# Altium PCB Car.PcbDoc
Units mm, origin at the board's own origin, x right, y up, seen from the top; angles counter-clockwise.
Board outline 55.67 x 34.21 mm, 2 copper layers (Top Layer, Bottom Layer); 28 components, 28 nets, 132 pads, 18 vias.
Unrouted connection lines stored in the file: 5.
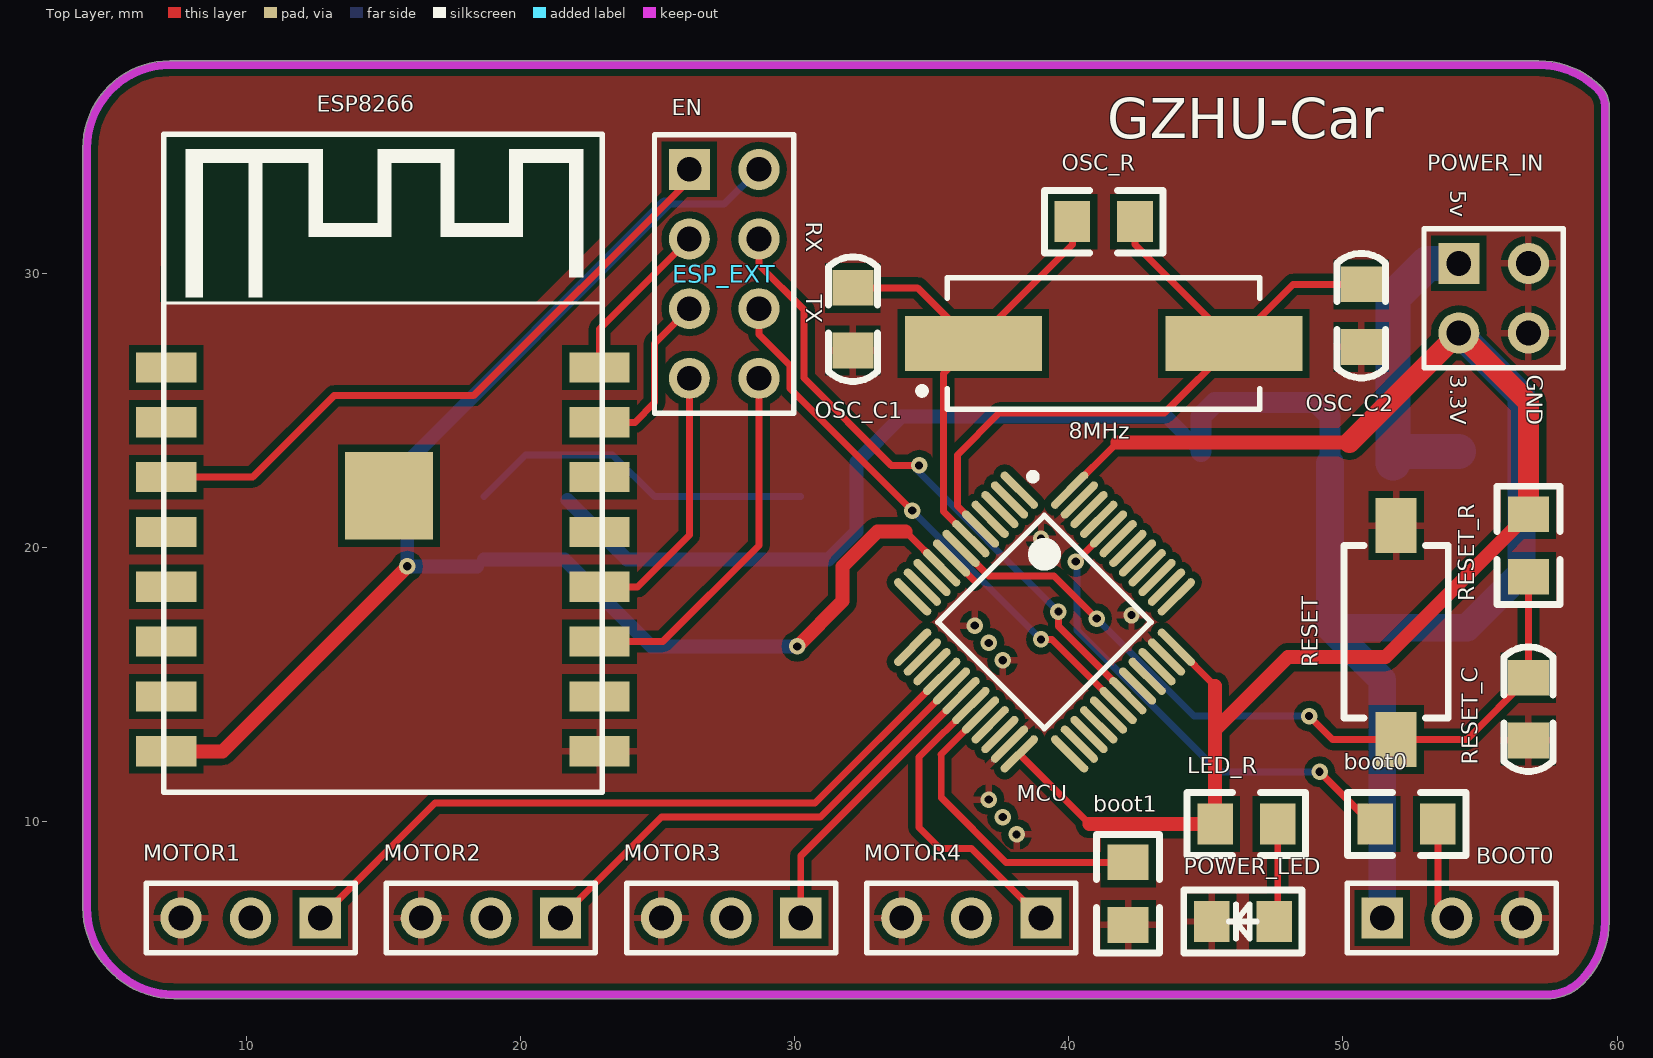
[diagram p0: Top Layer view]
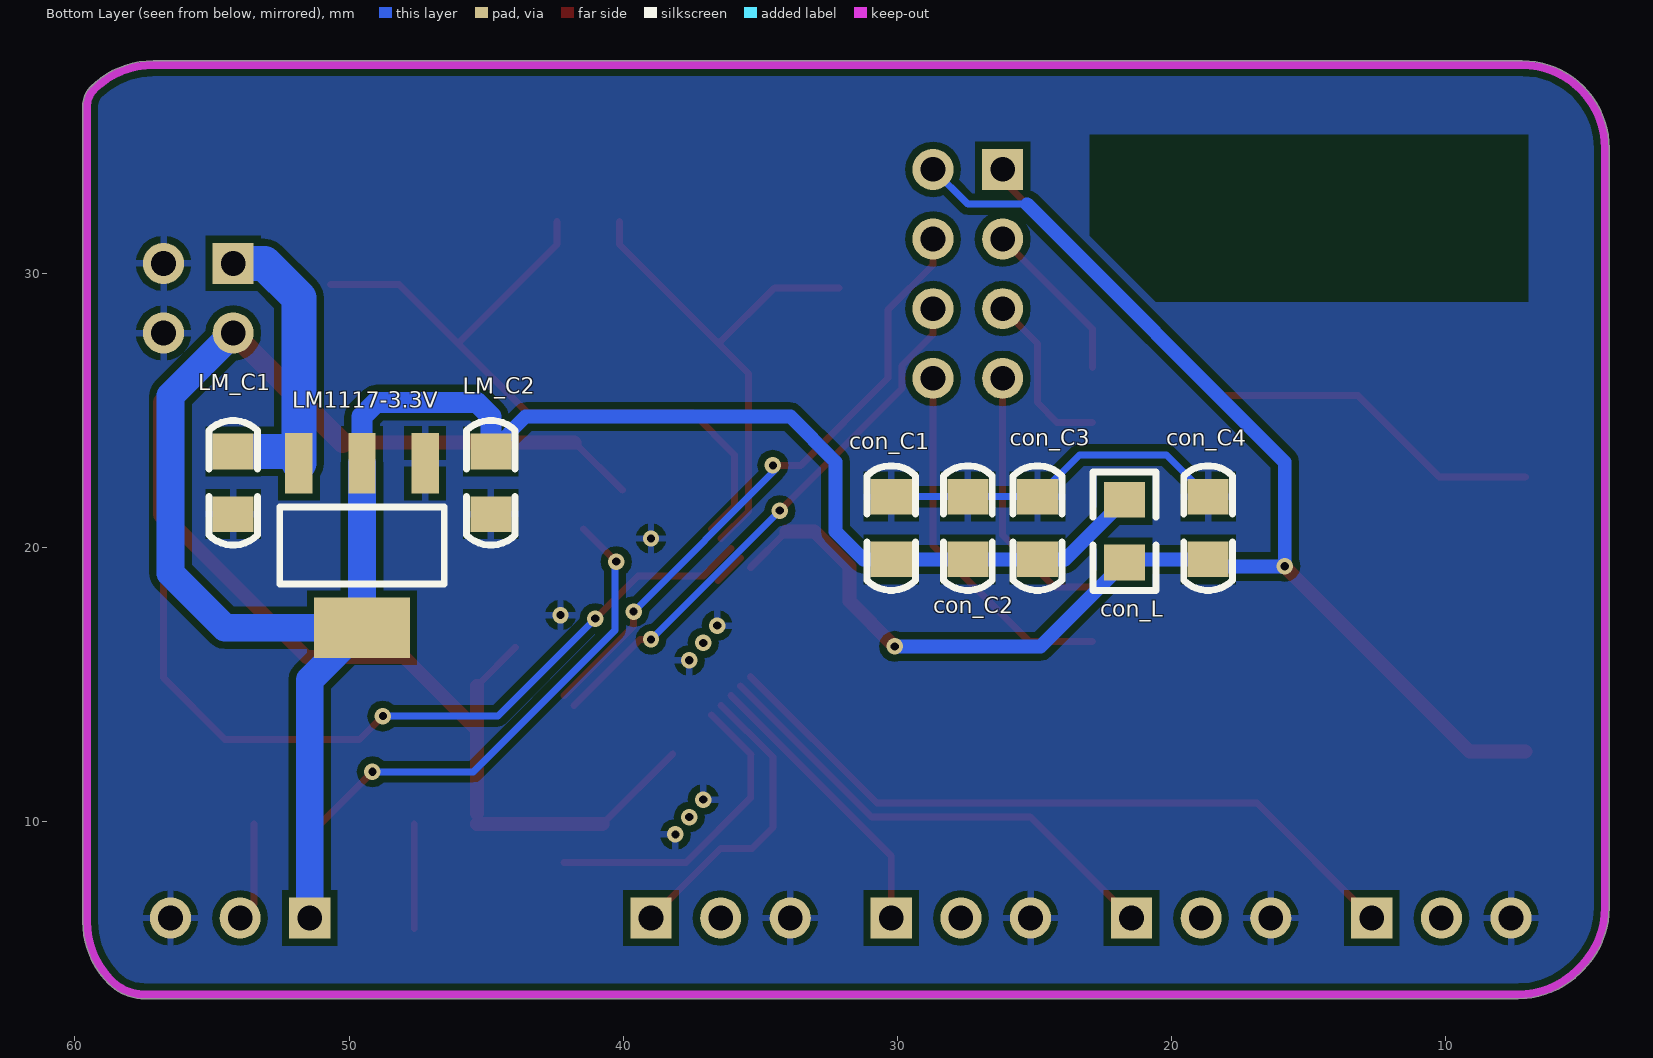
[diagram p1: Bottom Layer view, seen from below]
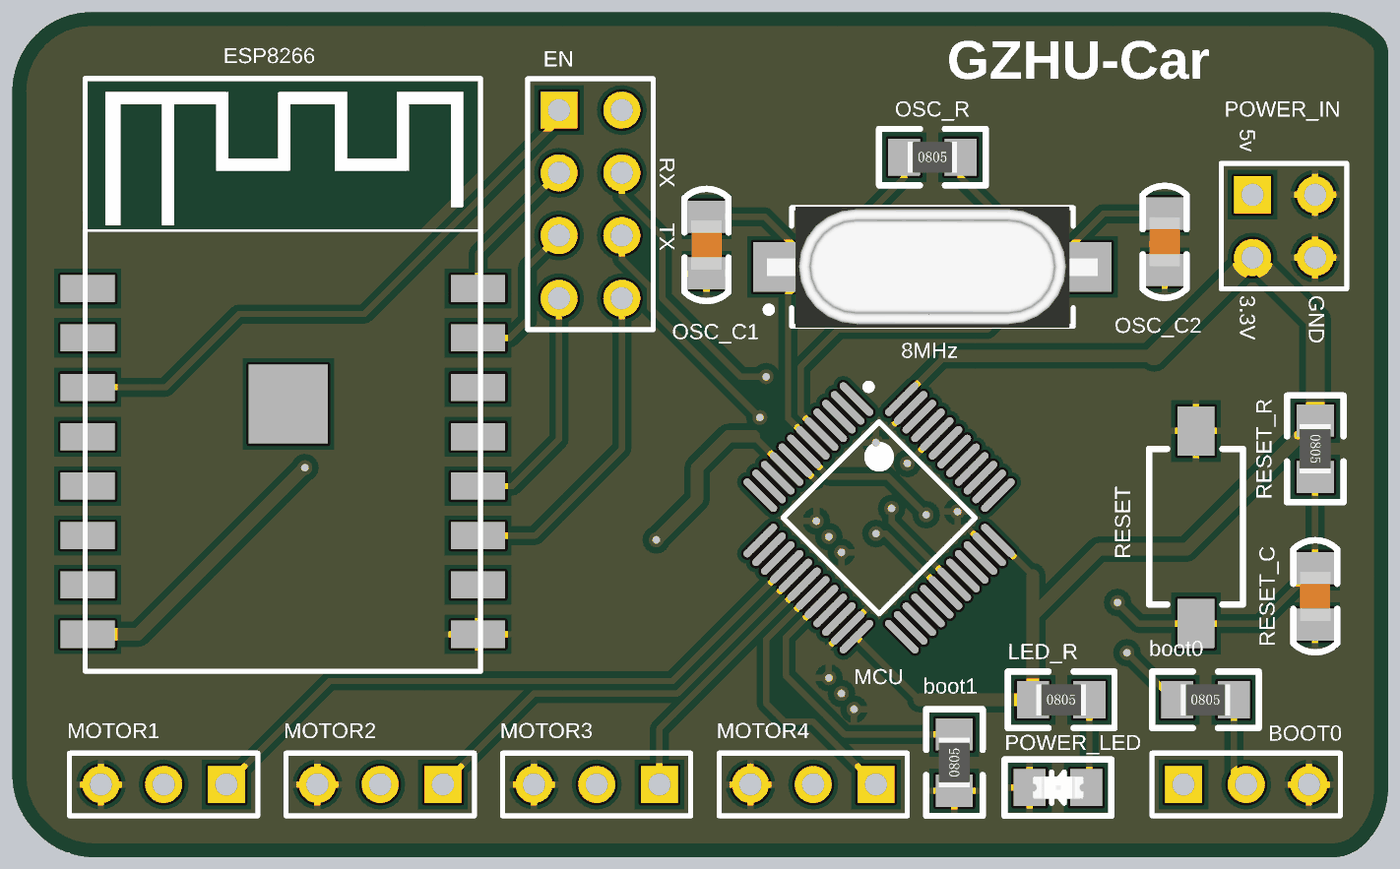
[diagram p2: 3D render of the assembled board from above, using the file's embedded part models]
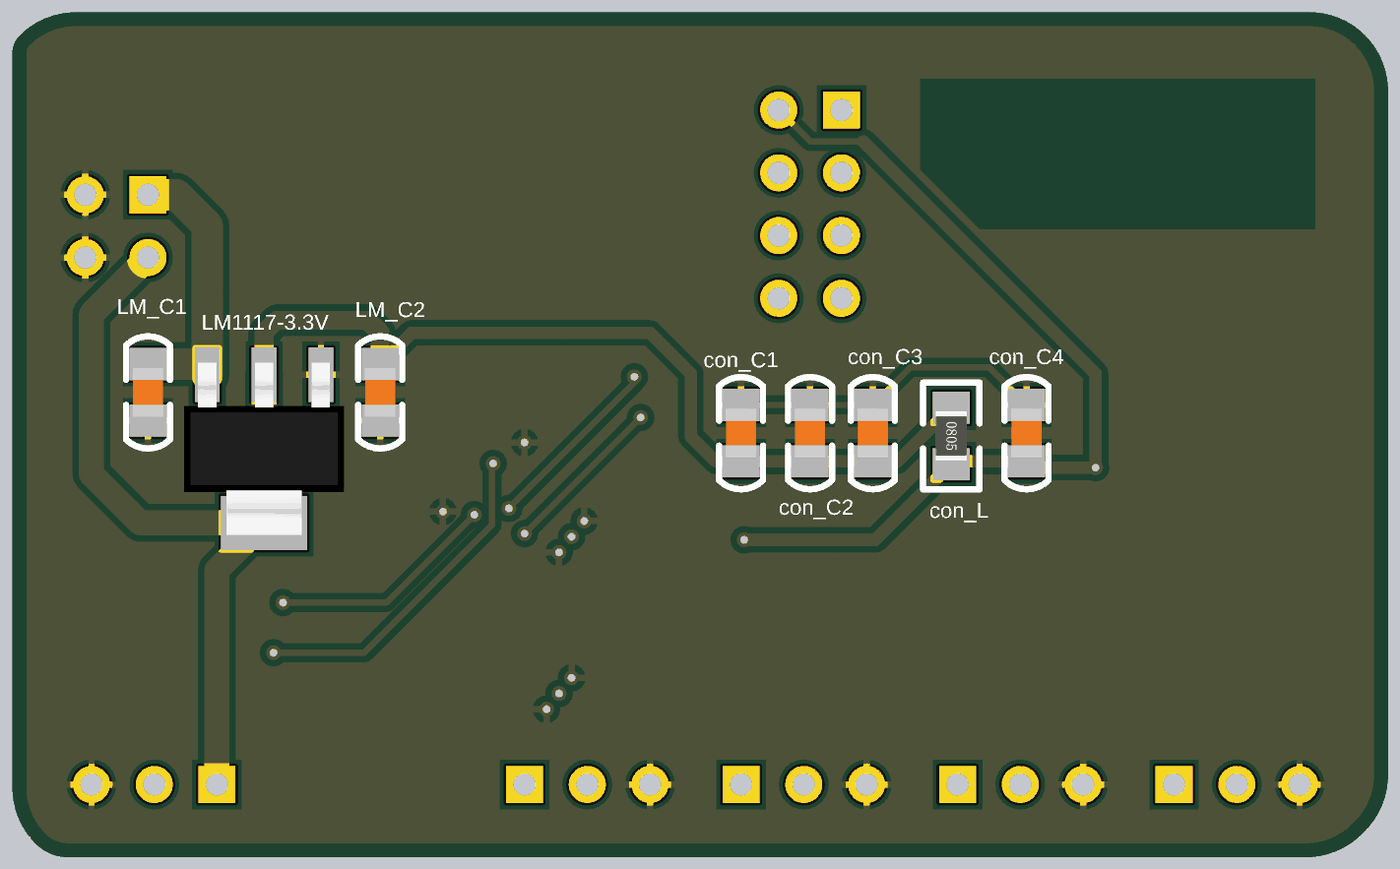
[diagram p3: 3D render of the assembled board from below, using the file's embedded part models]

## Layer stack, top to bottom
Top Solder: solder mask 0.0102, Solder Resist, Dk 3.5
Top Layer: signal copper 0.0356
Dielectric 1: dielectric 0.32, FR-4, Dk 4.8
Bottom Layer: signal copper 0.0356
Bottom Solder: solder mask 0.0102, Solder Resist, Dk 3.5

## Board outline
5.092,4.475 4.983,4.584 cw(c7.257,6.858) 4.041,6.858 4.041,34.544 cw(c7.257,34.544) 4.983,36.818 cw(c7.213,34.588) 7.213,37.742 8.001,37.742 cw(c8.001,37.592) 8.002,37.742 57.15,37.742 cw(c57.15,34.526) 59.424,36.8 cw(c58.727,36.103) 59.713,36.103 59.713,6.35 cw(c56.497,6.35) 58.771,4.076 cw(c57.46,5.387) 57.46,3.533 7.366,3.533 cw(c7.366,6.749)

## Design rules (kind name [scope] priority, off if disabled: settings)
Clearance [All] p1: gap=0.254 ignorepadtopadclearanceinfootprint=FALSE except(0: Arc-Hole Track-Hole SMDPad-Hole THPad-Hole Via-Hole Fill-Hole Poly-Hole Region-Hole Text-Hole)
PolygonConnect [All] p1: connectstyle=Relief reliefconductorwidth=0.254 reliefentries=4 polygonreliefangle="90 Angle" airgapwidth=0.254
RoutingVias [All] p1: holewidth=0.711 width=1.27 viastyle="Through Hole" minholewidth=0.711 minwidth=1.27 maxholewidth=0.711 maxwidth=1.27
SolderMaskExpansion [All] p1: expansion=0.102
Width [All] p1: maxlimit=0.254 minlimit=0.254 preferedwidth=0.254
30 further rules are at their usual default settings.

## Components (designator, comment, footprint, x,y, rotation, side; value= is the part's Value field where it differs from the comment)
8MHz "8M" XTAL-C-SMD 41.275,27.432 r0 top
BOOT0 "Header 3" HDR1X3 51.435,6.477 r0 top
boot0 "Res2" 0805-R-SMD 52.324,9.906 r0 top value=1K
boot1 "Res2" 0805-R-SMD 42.164,7.366 r90 top value=1K
con_C1 "Cap" 0805-C-SMD 30.226,20.701 r270 bottom value=104
con_C2 "Cap" 0805-C-SMD 27.432,20.701 r270 bottom value=104
con_C3 "Cap" 0805-C-SMD 24.892,20.701 r270 bottom value=104
con_C4 "Cap" 0805-C-SMD 18.669,20.701 r270 bottom value=104
con_L "Inductor" 0805-R-SMD 21.717,20.587 r270 bottom value=4.7uh
ESP8266 "ESP-12S Module" "ESP-12S Module" 14.986,19.558 r0 top
ESP_EXT "Header 4X2" HDR2X4 26.162,33.782 r270 top
LED_R "Res2" 0805-R-SMD 46.482,9.906 r0 top value=1K
LM1117-3.3V "LM1117-3.3V" SOT-223 49.53,20.066 r90 bottom
LM_C1 "Cap" 0805-C-SMD 54.229,22.352 r90 bottom value=104
LM_C2 "Cap" 0805-C-SMD 44.831,22.352 r90 bottom value=104
MCU "STM32F103C8T6" LQFP48_N 39.116,17.272 r315 top
MOTOR1 "Header 3" HDR1X3 12.7,6.477 r180 top
MOTOR2 "Header 3" HDR1X3 21.463,6.477 r180 top
MOTOR3 "Header 3" HDR1X3 30.226,6.477 r180 top
MOTOR4 "Header 3" HDR1X3 38.989,6.477 r180 top
OSC_C1 "Cap" 0805-C-SMD 32.131,28.321 r270 top value=10pF
OSC_C2 "Cap" 0805-C-SMD 50.673,28.448 r270 top value=10pF
OSC_R "Res2" 0805-R-SMD 41.275,31.877 r0 top value=1M
POWER_IN "Header 2X2" HDR2X2 54.229,30.353 r270 top
POWER_LED "LED0" LED-0805 46.355,6.35 r180 top
RESET "RESET" 贴片按键 51.943,16.891 r270 top
RESET_C "Cap" 0805-C-SMD 56.769,14.097 r90 top value=104
RESET_R "Res2" 0805-R-SMD 56.769,20.066 r270 top value=10K

## Footprints (in the part's own frame and the unit in brackets; to place one, negate y for a bottom-side part, rotate by r counter-clockwise, add the part's x,y. Pads: shape width x height; smd on the part's side, far side on the other; paste and mask are expansions set on the pad)
0805-C-SMD [mm]
  rect 1.3x1.5 smd: 1(-1.143,0) 2(1.143,0)
  silkscreen extent -2.27,-0.89 2.27,0.89, body extent -1,-0.63 1,0.62, height 0.6
0805-R-SMD [mm]
  rect 1.3x1.5 smd: 1(-1.143,0) 2(1.143,0)
  silkscreen extent -2.16,-1.14 2.16,1.14, body extent -1,-0.63 1,0.63, height 0.55
"ESP-12S Module" [mm]
  rect 2.2x1.1 smd: 1(-7.9,7) 2(-7.9,5) 3(-7.9,3) 4(-7.9,1) 5(-7.9,-1) 6(-7.9,-3) 7(-7.9,-5) 8(-7.9,-7) 9(7.9,-7) 10(7.9,-5) 11(7.9,-3) 12(7.9,-1) 13(7.9,1) 14(7.9,3) 15(7.9,5) 16(7.9,7)
  rect 3.2x3.2 smd: 17(0.22,2.321)
  silkscreen extent -8,-8.5 8,15.5
HDR1X3 [mm] "Connector; Header; 3 Position"
  rect 1.5x1.5 hole 0.9: 1(0,0)
  round 1.5 hole 0.9: 2(2.54,0) 3(5.08,0)
  silkscreen extent -1.27,-1.27 6.35,1.27
HDR2X2 [mm] "Connector; Header; 2x2 Position"
  rect 1.5x1.5 hole 0.9: 1(0,0)
  round 1.5 hole 0.9: 2(0,2.54) 3(2.54,0) 4(2.54,2.54)
  silkscreen extent -1.27,-1.27 3.81,3.81
HDR2X4 [mm] "Connector; Header; 4x2 Position"
  rect 1.5x1.5 hole 0.9: 1(0,0)
  round 1.5 hole 0.9: 2(0,2.54) 3(2.54,0) 4(2.54,2.54) 5(5.08,0) 6(5.08,2.54) 7(7.62,0) 8(7.62,2.54)
  silkscreen extent -1.27,-1.27 8.89,3.81
LED-0805 [mm]
  rect 1.3x1.5 smd: 1(-1.143,0) 2(1.143,0)
  silkscreen extent -2.16,-1.14 2.16,1.14, body extent -1.04,-0.45 1.02,0.45, height 0.85
LQFP48_N [mm] "Thin QFP, 48-Leads, Body 7x7mm, Pitch 0.5mm, IPC Medium Density"
  oval 1.8x0.3 smd: 1(-4.05,2.75) 2(-4.05,2.25) 3(-4.05,1.75) 4(-4.05,1.25) 5(-4.05,0.75) 6(-4.05,0.25) 7(-4.05,-0.25) 8(-4.05,-0.75) 9(-4.05,-1.25) 10(-4.05,-1.75) 11(-4.05,-2.25) 12(-4.05,-2.75) 25(4.05,-2.75) 26(4.05,-2.25) 27(4.05,-1.75) 28(4.05,-1.25) 29(4.05,-0.75) 30(4.05,-0.25) 31(4.05,0.25) 32(4.05,0.75) 33(4.05,1.25) 34(4.05,1.75) 35(4.05,2.25) 36(4.05,2.75)
  oval 0.3x1.8 smd: 13(-2.75,-4.05) 14(-2.25,-4.05) 15(-1.75,-4.05) 16(-1.25,-4.05) 17(-0.75,-4.05) 18(-0.25,-4.05) 19(0.25,-4.05) 20(0.75,-4.05) 21(1.25,-4.05) 22(1.75,-4.05) 23(2.25,-4.05) 24(2.75,-4.05) 37(2.75,4.05) 38(2.25,4.05) 39(1.75,4.05) 40(1.25,4.05) 41(0.75,4.05) 42(0.25,4.05) 43(-0.25,4.05) 44(-0.75,4.05) 45(-1.25,4.05) 46(-1.75,4.05) 47(-2.25,4.05) 48(-2.75,4.05)
  silkscreen extent -4.17,-2.75 2.75,3.57, body extent -3.5,-3.5 3.5,3.5, height 1.6
SOT-223 [mm]
  rect 2.2x1 smd: 1(3,-2.3) 2(3,0) 3(3,2.3)
  rect 2.2x3.5 smd: 2(-3,0)
  silkscreen extent -1.4,-3 1.4,3, body extent -3.49,-3.24 3.49,3.24, height 1.64
XTAL-C-SMD [mm]
  rect 5x2 smd: 1(-4.75,0) 2(4.75,0)
  silkscreen extent -6.75,-2.4 5.7,2.4, body extent -6.7,-2.46 6.7,2.44, height 4
贴片按键 [mm]
  rect 2x1.5 smd: 1(-3.9,0) 2(3.9,0)
  silkscreen extent -3.17,-1.9 3.13,1.9, body extent -3.96,-1.94 3.93,1.91, height 2.5

## Part data
8MHz: library part XTAL, "Crystal Oscillator", LatestRevisionDate=17-Jul-2002, LatestRevisionNote="Re-released for DXP Platform.", PackageDescription="Crystal, Thru-Hole; 2 Leads; Body 3.1 x 8.2 mm (Dia.xH)", PackageReference=R38, Published=8-Jun-2000, Publisher="Altium Limited"
BOOT0 MOTOR1 MOTOR2 MOTOR3 MOTOR4: "Header, 3-Pin", LatestRevisionDate=17-Jul-2002, LatestRevisionNote="Re-released for DXP Platform.", Publisher="Altium Limited"
boot0 boot1 LED_R OSC_R RESET_R: "Resistor", LatestRevisionDate=17-Jul-2002, LatestRevisionNote="Re-released for DXP Platform.", PackageDescription="Axial Device, Thru-Hole; 2 Leads; 0.4 in Pin Spacing", PackageReference=AXIAL-0.4, Published=8-Jun-2000, Publisher="Altium Limited"
con_C1 con_C2 con_C3 con_C4 LM_C1 LM_C2 OSC_C1 OSC_C2 RESET_C: "Capacitor", LatestRevisionDate=17-Jul-2002, LatestRevisionNote="Re-released for DXP Platform.", PackageDescription="Radial Cap, Thru-Hole; 2 Leads; 0.3 in Pin Spacing", PackageReference=RAD-0.3, Published=8-Jun-2000, Publisher="Altium Limited"
ESP_EXT: "Header, 4-Pin, Dual row", LatestRevisionDate=17-Jul-2002, LatestRevisionNote="Re-released for DXP Platform.", Publisher="Altium Limited"
LM1117-3.3V: library part LM1117
MCU: "STM32 ARM-based 32-bit MCU with 64 Kbytes Flash, 48-pin LQFP, Industrial Temperature", ComponentLink1Description="Manufacturer Link", ComponentLink1URL=www.st.com/stm32, ComponentLink2Description=Datasheet, ComponentLink2URL=http://www.st.com/stonline/products/literature/ds/13587.pdf, DatasheetVersion="rev6, Mar-2008", PackageDescription="48-Pin Low-Profile Quad Flat Pack, 7 x 7 mm Body, 0.5 mm Pitch (LQFP48)", PackageReference=LQFP48, PackageVersion=Mar-2008, Published=30-May-2008, Publisher="Altium Limited"
POWER_IN: "Header, 2-Pin, Dual row", LatestRevisionDate=17-Jul-2002, LatestRevisionNote="Re-released for DXP Platform.", Publisher="Altium Limited"
POWER_LED: "Typical INFRARED GaAs LED", LatestRevisionDate=08-Jul-2005, LatestRevisionNote="Mech Layer 1 removed.", PackageDescription="LED; 2 Leads", PackageReference=LED-0, Published=8-Jun-2000, Publisher="Altium Limited"
RESET: library part SW-PB, "Switch", LatestRevisionDate=17-Jul-2002, LatestRevisionNote="Re-released for DXP Platform.", PackageDescription="Switch; 2 Leads", PackageReference=SPST-2, Published=24-Mar-1999, Publisher="Altium Limited"
con_L: Code_IEC=1005, Code_JEITA=0402, LatestRevisionDate=29-May-2009, LatestRevisionNote="IPC-7351 Footprint Added.", PackageDescription="Chip Inductor", PackageReference=0402-A, Published=8-Jun-2000, Publisher="Altium Limited"

## Via types
v1: diameter 0.6, hole 0.3, Top Layer to Bottom Layer, 18 vias

## Nets (pads, with @x,y where several pads share a name; then routed paths per layer and width w, separated by ;. In a path a pad name is that pad's centre, name@x,y a point inside that pad or via, vN(x,y) a via of type N, cw(c..) or ccw(c..) an arc to the next point about the centre after c; other vN are vias at no path point)
+3.3V: BOOT0.1 con_C1.2 con_C2.2 con_C3.2 con_L.1 LED_R.1 LM1117-3.3V.2 LM_C2.2 MCU.24 MCU.36 MCU.48 POWER_IN.3 RESET_R.1 | length 124.9
  Top Layer w0.254: MCU.24 40.754,9.906 ; MCU.48 41.783,23.828 ; MCU.36 45.339,14.938
  Top Layer w0.508: 40.754,9.906 LED_R.1 ; 41.783,23.828 50.244,23.828 ; LED_R.1@45.339,10.287 45.339,13.335 ; 45.339,14.938 45.339,13.335 ; RESET_R.1 51.562,16.002 48.006,16.002 45.339,13.335
  Top Layer w0.762: 50.244,23.828 POWER_IN.3 56.769,25.273 RESET_R.1
  Bottom Layer w0.508: con_L.1 23.889,19.558 con_C3.2 con_C2.2 con_C1.2 31.242,19.558 32.258,20.574 32.258,23.114 33.909,24.765 43.561,24.765 LM_C2.2
  Bottom Layer w0.762: LM_C2.2 44.831,24.765 45.339,25.273 49.022,25.273 49.53,24.765 LM1117-3.3V.2@49.53,23.066
  Bottom Layer w1.016: LM1117-3.3V.2@49.53,23.066 LM1117-3.3V.2@49.53,17.066 ; BOOT0.1 51.435,15.161 LM1117-3.3V.2@49.53,17.066 ; POWER_IN.3 56.515,25.527 56.515,19.05 54.531,17.066 LM1117-3.3V.2@49.53,17.066
+5V: LM1117-3.3V.3 LM_C1.2 POWER_IN.1 | length 11.5
  Bottom Layer w0.254: LM1117-3.3V.3 LM1117-3.3V.3@52.259,23.495
  Bottom Layer w1.27: LM1117-3.3V.3 51.83,29.097 53.086,30.353 POWER_IN.1 ; LM1117-3.3V.3@52.259,23.495 LM_C1.2
ADC12_IN0: MCU.10
ADC12_IN1: MCU.11
ADC12_IN2: MCU.12
ADC12_IN3: MCU.13
ADC12_IN4: MCU.14
ADC12_IN5: MCU.15
BOOT0: boot0.1 MCU.44 | length 17.9
  Top Layer w0.254: v1(40.259,19.476) MCU.44 ; v1(49.149,11.811) boot0.1@51.054,9.906
  Bottom Layer w0.254: v1(40.259,19.476) 40.305,19.43 40.305,16.972 45.466,11.811 v1(49.149,11.811)
BOOT1: boot1.2 MCU.20 | length 11.4
  Top Layer w0.254: 35.345,12.44 MCU.20 ; 35.356,12.44 35.351,12.435 35.351,10.877 37.719,8.509 boot1.2
D3.3V: con_C4.2 con_L.2 ESP8266.8 ESP_EXT.2 MCU.9 | length 56.6
  Top Layer w0.254: 34.041,20.579 MCU.9
  Top Layer w0.508: ESP8266.8 9.129,12.558 v1(15.875,19.304) ; v1(30.099,16.383) 31.75,18.034 31.75,19.304 33.025,20.579 34.041,20.579
  Bottom Layer w0.254: con_C4.2@18.415,19.304 con_C4.2 ; 25.273,32.512 27.432,32.512 ESP_EXT.2 ; v1(30.099,16.383) v1@30.226,16.383
  Bottom Layer w0.508: con_C4.2@18.415,19.304 v1(15.875,19.304) 15.875,23.114 25.273,32.512 ; con_C4.2 con_L.2@21.603,19.558 ; con_L.2 24.778,16.383 v1(30.099,16.383)
ESP_EN: ESP8266.3 ESP_EXT.1 | length 23.9
  Top Layer w0.254: ESP8266.3 10.239,22.558 13.208,25.527 18.288,25.527 26.162,33.401 ESP_EXT.1
ESP_IO0: ESP8266.12 ESP_EXT.7 | length 9.8
  Top Layer w0.254: ESP8266.12 24.273,18.558 26.162,20.447 ESP_EXT.7
ESP_IO2: ESP8266.11 ESP_EXT.8 | length 13.4
  Top Layer w0.254: ESP8266.11 25.194,16.558 28.702,20.066 ESP_EXT.8
ESP_RXD: ESP8266.15 ESP_EXT.5 | length 6.3
  Top Layer w0.254: ESP8266.15 24.177,24.558 24.892,25.273 24.892,27.432 ESP_EXT.5
ESP_TXD: ESP8266.16 ESP_EXT.3 | length 6
  Top Layer w0.254: ESP8266.16 22.886,27.966 ESP_EXT.3
GND: BOOT0.3 boot1.1 con_C1.1 con_C2.1 con_C3.1 con_C4.1 ESP8266.9 LM1117-3.3V.1 LM_C1.1 LM_C2.1 MCU.8 MCU.23 MCU.35 MCU.47 MOTOR1.3 MOTOR2.3 MOTOR3.3 MOTOR4.3 OSC_C1.2 OSC_C2.2 POWER_IN.2 POWER_IN.4 POWER_LED.2 RESET.1 RESET_C.1 | length 14
  Top Layer w0.254: MCU.8 36.543,18.784
  Bottom Layer w0.254: con_C4.1 20.193,23.368 23.368,23.368 con_C3.1 con_C2.1 con_C1.1
  other v1: 38.1,9.525 37.592,10.16 37.084,10.795 37.592,15.875 37.084,16.51 36.576,17.145 42.291,17.526 38.989,20.32
MOTOR1: MCU.16 MOTOR1.1 | length 26.3
  Top Layer w0.254: MOTOR1.1 16.891,10.668 30.744,10.668 MCU.16
MOTOR2: MCU.17 MOTOR2.1 | length 17.8
  Top Layer w0.254: MOTOR2.1 25.146,10.16 30.943,10.16 MCU.17
MOTOR3: MCU.18 MOTOR3.1 | length 10.5
  Top Layer w0.254: MOTOR3.1 30.226,8.736 MCU.18
MOTOR4: MCU.19 MOTOR4.1 | length 11
  Top Layer w0.254: MCU.19 34.544,12.346 34.544,9.779 35.306,9.017 36.449,9.017 MOTOR4.1
Net8MHz_1: 8MHz.1 MCU.6 OSC_C1.1 OSC_R.1 | length 19.2
  Top Layer w0.254: OSC_C1.1 34.493,29.464 8MHz.1 ; MCU.6 35.433,21.309 35.433,26.34 8MHz.1 ; OSC_R.1 40.132,31.039 8MHz.1
Net8MHz_2: 8MHz.2 MCU.5 OSC_C2.1 OSC_R.2 | length 26.3
  Top Layer w0.254: MCU.5 35.941,21.508 35.941,23.368 37.465,24.892 43.485,24.892 8MHz.2 ; OSC_R.2 42.418,31.039 8MHz.2 ; OSC_C2.1 48.184,29.591 8MHz.2
NetBOOT0_2: BOOT0.2 boot0.2 | length 3.6
  Top Layer w0.254: boot0.2 53.467,6.985 BOOT0.2
NetLED_R_2: LED_R.2 POWER_LED.1 | length 3.8
  Top Layer w0.254: POWER_LED.1@47.625,6.096 LED_R.2
NetMCU_7: MCU.7 RESET.2 RESET_C.2 RESET_R.2 | length 28.2
  Top Layer w0.254: MCU.7 37.084,18.95 39.47,18.95 v1(41.021,17.399) ; v1(48.768,13.843) 49.62,12.991 RESET.2 54.52,12.991 RESET_C.2 RESET_R.2
  Bottom Layer w0.254: v1(41.021,17.399) 44.577,13.843 v1(48.768,13.843)
RX: ESP_EXT.4 MCU.31 | length 22.6
  Top Layer w0.254: ESP_EXT.4 28.702,30.301 30.341,28.662 30.341,26.174 33.528,22.987 v1(34.544,22.987) ; v1(39.624,17.653) 39.624,17.118 MCU.31
  Bottom Layer w0.254: v1@34.48,22.796 v1@39.56,17.716
TX: ESP_EXT.6 MCU.30 | length 20.1
  Top Layer w0.254: ESP_EXT.6 28.702,27.761 29.833,26.63 29.833,25.793 v1(34.29,21.336) ; v1(38.989,16.637) 39.397,16.637 MCU.30
  Bottom Layer w0.254: v1(34.29,21.336) v1(38.989,16.637)
pads on no net: ESP8266.1 ESP8266.2 ESP8266.4 ESP8266.5 ESP8266.6 ESP8266.7 ESP8266.10 ESP8266.13 ESP8266.14 ESP8266.17 MCU.1 MCU.2 MCU.3 MCU.4 MCU.21 MCU.22 MCU.25 MCU.26 MCU.27 MCU.28 MCU.29 MCU.32 MCU.33 MCU.34 MCU.37 MCU.38 MCU.39 MCU.40 MCU.41 MCU.42 MCU.43 MCU.45 MCU.46 MOTOR1.2 MOTOR2.2 MOTOR3.2 MOTOR4.2

## Polygon pours and split planes (outlines as drawn)
GND on Top Layer "GND_L01_P000" (solid, remove dead copper, pour order 0): 2.159,38.481 2.413,38.735 61.087,38.735 61.087,3.429 59.563,1.905 1.143,1.905
GND on Bottom Layer "GND_L02_P002" (solid, remove dead copper, pour order 2): 1.524,39.624 60.833,39.624 63.881,36.576 62.738,35.433 62.738,1.143 2.921,1.143 2.667,1.397

## Keep-outs
Keep-Out Layer:
  lines w0.3: 4.191,32.893 4.191,34.544 cw(c7.257,34.544) 5.089,36.712 cw(c7.213,34.588) 7.213,37.592 8.001,37.592 ; 4.191,34.417 4.191,6.858 ccw(c7.257,6.858) 5.089,4.69 5.198,4.581 ccw(c7.366,6.749) 7.366,3.683 57.46,3.683 ccw(c57.46,5.387) 58.665,4.182 ccw(c56.497,6.35) 59.563,6.35 59.563,36.103 ccw(c58.727,36.103) 59.318,36.694 ccw(c57.15,34.526) 57.15,37.592 7.747,37.592

## Other copper
Top Layer:
  pour cut-out: 6.985,35.052 22.987,35.052 22.987,31.369 20.574,28.956 6.858,28.956
  pour cut-out: 6.985,35.052
Bottom Layer:
  pour cut-out: 6.985,35.052 22.987,35.052 22.987,31.369 20.574,28.956 6.985,28.956

## Silkscreen, mask and mechanical layers (free items; w line width, h text height)
Top Overlay:
  text "GZHU-Car" at 41.402,34.417 h2.5

## Text inside footprints (layer, text, board x,y; h text height)
ESP_EXT: Top Overlay "RX" at 30.226,31.877 h1 r270; Top Overlay "EN" at 25.527,35.56 h1; Top Overlay "TX" at 30.226,29.21 h1 r270
POWER_IN: Top Overlay "5v" at 53.721,33.02 h1 r270; Top Overlay "GND" at 56.515,26.289 h1 r270; Top Overlay "3.3V" at 53.721,26.289 h1 r270